# EAGLE board PCB Design (EAGLE 9.1.3)
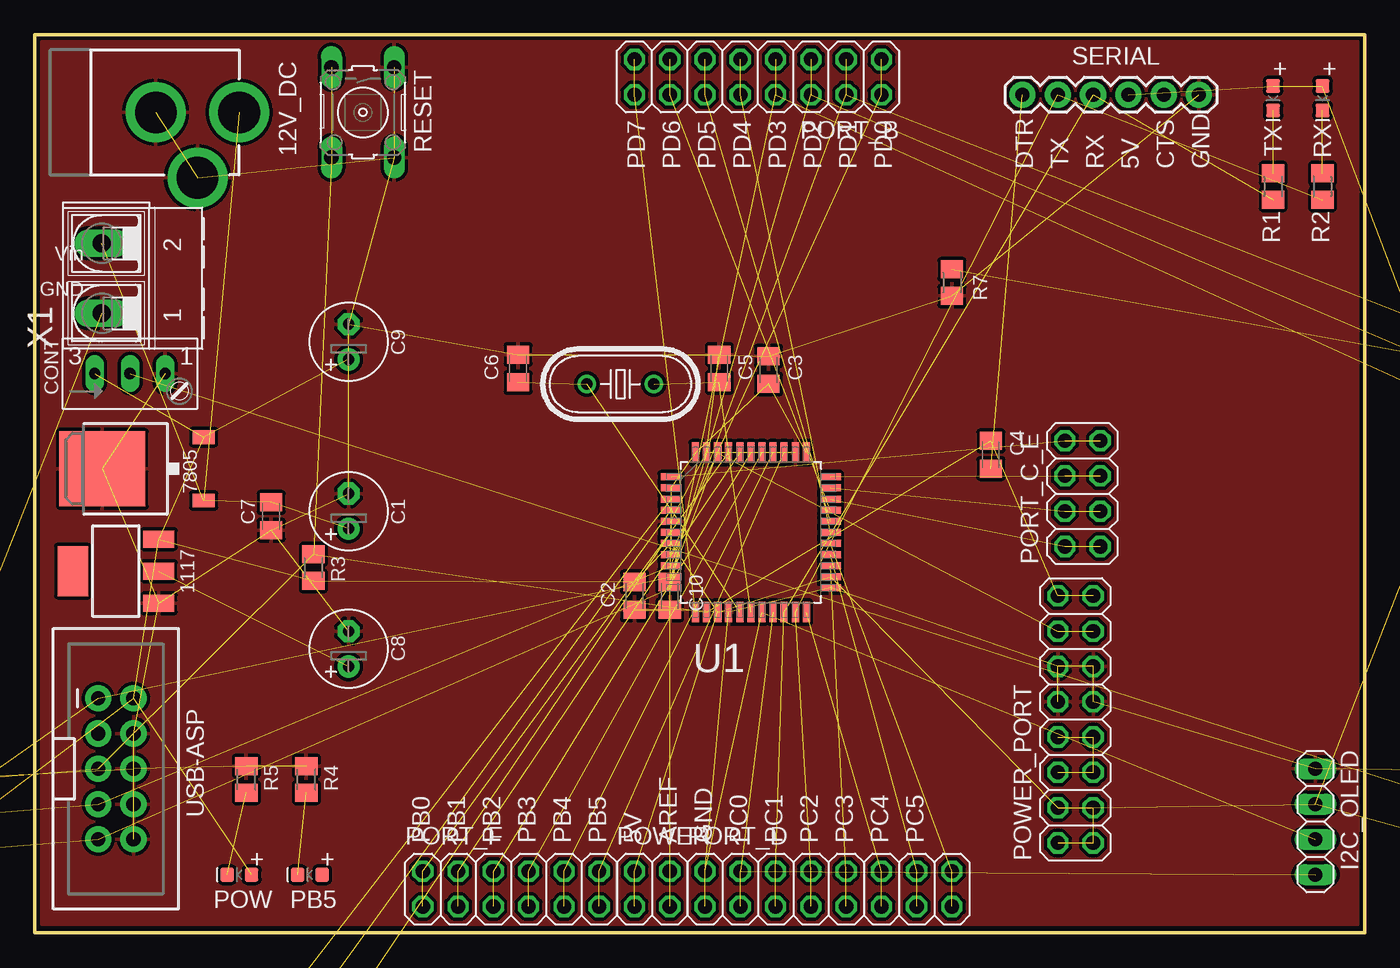
[diagram p0: board, top side]
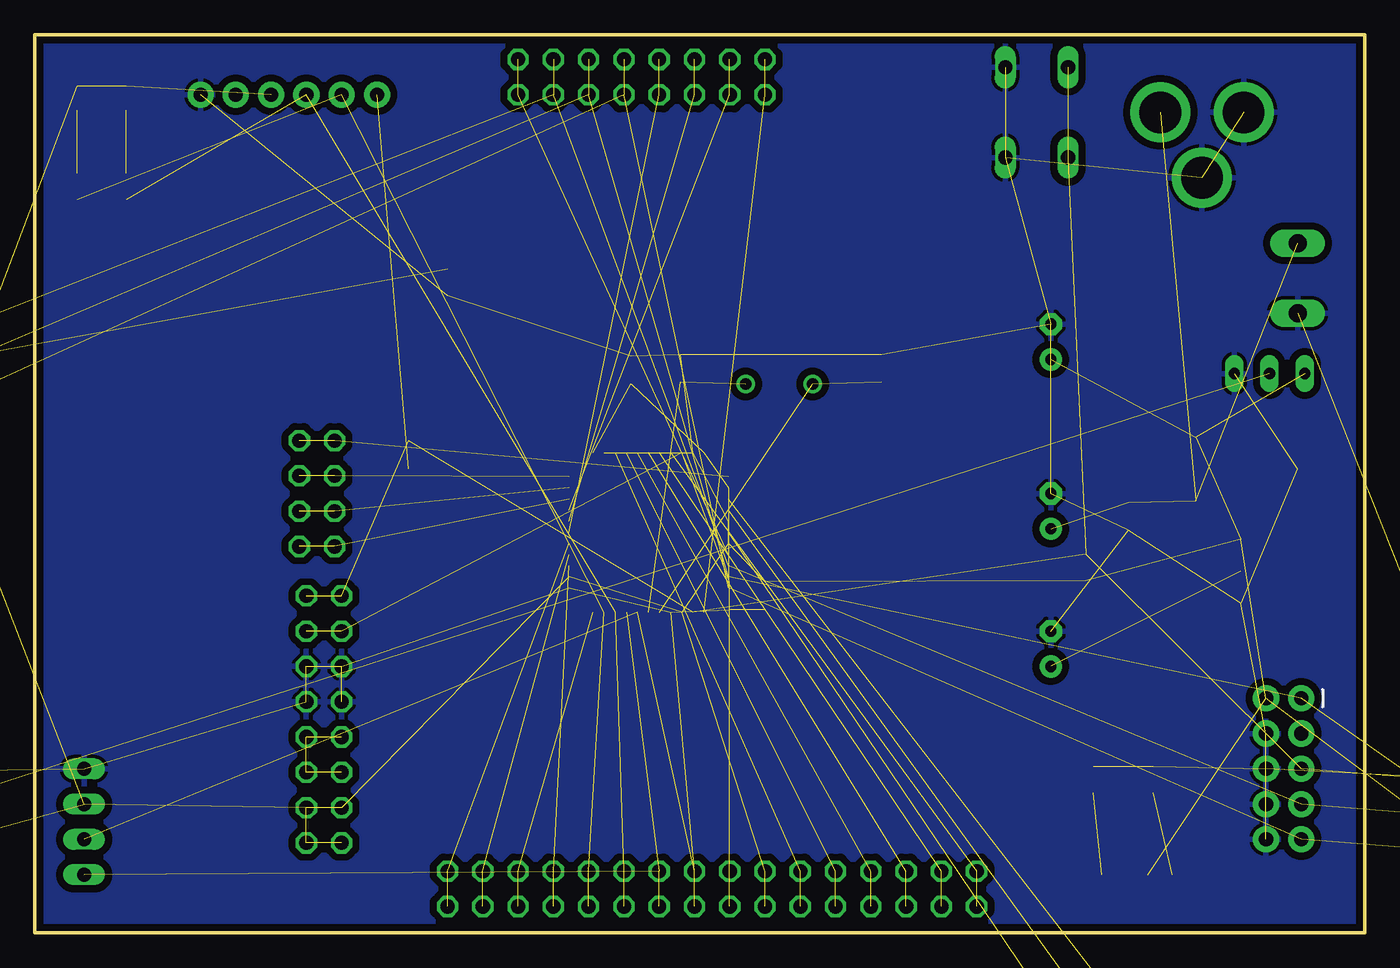
[diagram p1: board, bottom side, seen from below]

Size 95.76 x 64.64 mm. Coordinates in mm from the lower left corner, seen from the top.
Outline: 0,64.64 95.76,64.64 95.76,0 0,0 0,64.64
Copper layers (1*16): Top 0.035mm / dielectric 1.5mm / Bottom 0.035mm
Design rules "SparkFun-2-layer-STANDARD *": minimum track width 10mil, minimum drill 19mil, track to track 10mil, track to pad 8mil, pad to pad 8mil, via to via 10mil, smd to smd 8mil, copper to edge 8mil, drill to drill 8mil, minimum pad ring 10mil, minimum via ring 10mil, stop-mask expansion 4mil, vias tented up to drill 25mil, thermal gap 10mil

## Footprints (pad centres in the part's own frame; a part is rotated, then mirrored left to right if it is on the bottom)
POWER_JACK_PTH = drill 2.997 pad 4.318: GND 0,7.7; GNDBREAK 4.7,10.7; PWR 0,13.7
SOT223 = smd 1.219 x 2.235: 1 -2.311,-3.099; 2 0,-3.099; 3 2.311,-3.099 | smd 3.6 x 2.2: 4 0,3.099
TO-252 = smd 1 x 1.6: 1 -2.28,-4.8; 2 2.28,-4.8 | smd 5.4 x 6.2: 3 0,2.5
B3F-10XX = drill 1.016 long: 1 -3.251,2.261; 2 3.251,2.261; 3 -3.251,-2.261; 4 3.251,-2.261
E2,5-6 = drill 0.813 pad 1.6: + -1.27,0 | drill 0.813 pad 1.6 octagon: - 1.27,0
C0805K = smd 1.3 x 1.6: 1 -1,0; 2 1,0
S64W = drill 0.813 long: A 2.54,1.27; E -2.54,1.27; S 0,1.27
1X04 = drill 1.016 long: 1 -3.81,0; 2 -1.27,0; 3 1.27,0; 4 3.81,0
2X3 = drill 1.016 pad 1.88: 1 0,0; 2 0,2.54; 3 2.54,0; 4 2.54,2.54; 5 5.08,0; 6 5.08,2.54
USB-MICROB-PTH = smd 0.4 x 1.75: D+ 0.031,1.331; D- -0.619,1.331; GND 1.331,1.331; ID 0.681,1.331; VBUS -1.269,1.331 | smd 1.4 x 2.1 bottom: P$1 2.701,-1.142; P$3 -2.659,-1.144 | smd 1 x 1.3: P$2 2.487,1.594; P$6 -2.368,1.604 | smd 1 x 1.3 bottom: P$4 -2.368,1.604; P$10 2.481,1.598 | smd 1.1 x 1.5: P$8 2.701,-1.142; P$12 -2.659,-1.144 | smd 2 x 1.46: SHEILD2 2.831,1.606; SHIELD -2.794,1.606 | smd 1.425 x 2.5: SHIELD3 -0.979,-1.349; SHIELD4 0.996,-1.352 | hole 0.7: -2.693,-1.134; -2.693,-1.3; -2.694,-1.499; -2.694,-1.664; 2.768,-1.134; 2.767,-1.303; 2.766,-1.496; 2.766,-1.664 | hole 0.66: -2.359,1.821; -2.349,1.691; -2.359,1.541; -2.354,1.432; 2.481,1.821; 2.491,1.691; 2.481,1.541; 2.486,1.432
SMT-JUMPER_3_1-NC_PASTE_SILK = smd 0.635 x 1.27: 1 -0.813,0; 2 0,0; 3 0.813,0
LCD-16X2_NOSILK = drill 1.016 pad 1.88 square: 1 -32,15.5 | drill 1.016 pad 1.88: 2 -29.46,15.5; 3 -26.92,15.5; 4 -24.38,15.5; 5 -21.84,15.5; 6 -19.3,15.5; 7 -16.76,15.5; 8 -14.22,15.5; 9 -11.68,15.5; 10 -9.14,15.5; 11 -6.6,15.5; 12 -4.06,15.5; 13 -1.52,15.5; 14 1.02,15.5; 15 3.56,15.5; 16 6.1,15.5 | hole 2.8: -37.5,15.5; -37.5,-15.5; 37.5,15.5; 37.5,-15.5
LED-0603 = smd 1 x 1: A -0.877,0; C 0.877,0
2X08 = drill 1.016 octagon: 1 -8.89,-1.27; 2 -8.89,1.27; 3 -6.35,-1.27; 4 -6.35,1.27; 5 -3.81,-1.27; 6 -3.81,1.27; 7 -1.27,-1.27; 8 -1.27,1.27; 9 1.27,-1.27; 10 1.27,1.27; 11 3.81,-1.27; 12 3.81,1.27; 13 6.35,-1.27; 14 6.35,1.27; 15 8.89,-1.27; 16 8.89,1.27
2X04 = drill 1.016 octagon: 1 -3.81,-1.27; 2 -3.81,1.27; 3 -1.27,-1.27; 4 -1.27,1.27; 5 1.27,-1.27; 6 1.27,1.27; 7 3.81,-1.27; 8 3.81,1.27
2X06 = drill 1.016 octagon: 1 -6.35,-1.27; 2 -6.35,1.27; 3 -3.81,-1.27; 4 -3.81,1.27; 5 -1.27,-1.27; 6 -1.27,1.27; 7 1.27,-1.27; 8 1.27,1.27; 9 3.81,-1.27; 10 3.81,1.27; 11 6.35,-1.27; 12 6.35,1.27
2X03 = drill 1.016 octagon: 1 -2.54,-1.27; 2 -2.54,1.27; 3 0,-1.27; 4 0,1.27; 5 2.54,-1.27; 6 2.54,1.27
HC49U70 = drill 0.813: 1 -2.413,0; 2 2.413,0
M0805 = smd 1.3 x 1.6: 1 -0.95,0; 2 0.95,0
FTDI_BASIC = drill 1.016 pad 1.88: CTS 10.16,0; DTR 0,0; GND 12.7,0; RXI 2.54,0; TXO 5.08,0; VCC 7.62,0
1X06 = drill 1.016 long: 1 -6.35,0; 2 -3.81,0; 3 -1.27,0; 4 1.27,0; 5 3.81,0; 6 6.35,0
QFP80P1200X1200X120-44N = smd 1.473 x 0.508: 1 -5.74,3.988; 2 -5.74,3.2; 3 -5.74,2.388; 4 -5.74,1.6; 5 -5.74,0.787; 6 -5.74,0; 7 -5.74,-0.787; 8 -5.74,-1.6; 9 -5.74,-2.388; 10 -5.74,-3.2; 11 -5.74,-3.988; 23 5.74,-3.988; 24 5.74,-3.2; 25 5.74,-2.388; 26 5.74,-1.6; 27 5.74,-0.787; 28 5.74,0; 29 5.74,0.787; 30 5.74,1.6; 31 5.74,2.388; 32 5.74,3.2; 33 5.74,3.988 | smd 0.508 x 1.473: 12 -3.988,-5.74; 13 -3.2,-5.74; 14 -2.388,-5.74; 15 -1.6,-5.74; 16 -0.787,-5.74; 17 0,-5.74; 18 0.787,-5.74; 19 1.6,-5.74; 20 2.388,-5.74; 21 3.2,-5.74; 22 3.988,-5.74; 34 3.988,5.74; 35 3.2,5.74; 36 2.388,5.74; 37 1.6,5.74; 38 0.787,5.74; 39 0,5.74; 40 -0.787,5.74; 41 -1.6,5.74; 42 -2.388,5.74; 43 -3.2,5.74; 44 -3.988,5.74
2X5-SHROUDED = drill 1.016 pad 1.88: 1 -1.27,5.08; 2 1.27,5.08; 3 -1.27,2.54; 4 1.27,2.54; 5 -1.27,0; 6 1.27,0; 7 -1.27,-2.54; 8 1.27,-2.54; 9 -1.27,-5.08; 10 1.27,-5.08
AK500/2-H = drill 1.321 long: 1 -2.515,0; 2 2.515,0

## Placement (x,y rotation side)
12V_DC  POWER_JACK  [POWER_JACK_PTH]  1.02,59.05 270 top
1117  V_REG_LD1117VXXLD1117-SMD  [SOT223]  5.84,26.04 90 top
7805  5V  [TO-252]  7.37,33.4 90 top
BUTTON_1  [B3F-10XX]  -30.99,-63.88 0 top  (outside the outline)
BUTTON_2  [B3F-10XX]  -50.8,-81.15 0 top  (outside the outline)
C1  10uf  [E2,5-6]  22.61,30.35 90 top
C2  .1uF  [C0805K]  43.18,24.26 270 top
C3  .1uF  [C0805K]  52.83,40.51 90 top
C4  0.33µF  [C0805K]  68.83,34.42 270 top
C5  22pF  [C0805K]  49.28,40.62 270 top
C6  22pF  [C0805K]  34.8,40.62 270 top
C7  .1uf  [C0805K]  17.02,29.99 270 top
C8  10uf  [E2,5-6]  22.61,20.45 90 top
C9  10uf  [E2,5-6]  22.61,42.55 90 top
C10  .1uF  [C0805K]  45.72,24.26 270 top
C11  1uF  [E2,5-6]  -12.19,-58.8 0 top  (outside the outline)
CONT  50k  [S64W]  6.86,38.99 0 top
I2C_OLED  [1X04]  92.2,8 270 top
J1  AVR_SPI_PROG_3X2PTH  [2X3]  -4.83,5.97 90 top  (outside the outline)
J2  AMP FCI 10103594-0001LF  [USB-MICROB-PTH]  -10.92,-38.23 0 top  (outside the outline)
JP2  JUMPER-SMT_3_1-NC_PASTE_SILK  [SMT-JUMPER_3_1-NC_PASTE_SILK]  -38.1,-73.53 0 top  (outside the outline)
JP3  JUMPER-SMT_3_1-NC_PASTE_SILK  [SMT-JUMPER_3_1-NC_PASTE_SILK]  -48.01,-73.53 0 top  (outside the outline)
JP4  JUMPER-SMT_3_1-NC_PASTE_SILK  [SMT-JUMPER_3_1-NC_PASTE_SILK]  -48.01,-86.74 0 top  (outside the outline)
JP5  JUMPER-SMT_3_1-NC_PASTE_SILK  [SMT-JUMPER_3_1-NC_PASTE_SILK]  -48.01,-90.81 0 top  (outside the outline)
LCD1  LCD-16X2NOSILK  [LCD-16X2_NOSILK]  127,33.4 90 top  (outside the outline)
PB1  Yellow  [LED-0603]  -13.46,-16.13 0 top  (outside the outline)
PB2  Yellow  [LED-0603]  -13.46,-25.53 0 top  (outside the outline)
PB5  Yellow  [LED-0603]  19.81,4.19 180 top
PORT_B  [2X08]  52.07,61.59 180 top
PORT_C_E  [2X04]  75.44,31.62 90 top
PORT_D  [2X08]  57.15,3.18 0 top
PORT_F  [2X06]  34.29,3.18 0 top
POW  RED  [LED-0603]  14.73,4.19 180 top
POWER  [2X03]  45.72,3.18 0 top
POWER_PORT  [2X08]  74.93,15.37 90 top
Q1  16MHz  [HC49U70]  42.16,39.5 180 top
R1  1K  [M0805]  89.15,53.72 90 top
R2  1K  [M0805]  92.71,53.72 90 top
R3  10k  [M0805]  20.07,26.29 90 top
R4  1K  [M0805]  19.56,11.05 270 top
R5  1K  [M0805]  15.24,11.05 270 top
R6  1K  [M0805]  -13.21,-11.3 0 top  (outside the outline)
R7  220  [M0805]  66.04,46.8 90 top
R8  1K  [M0805]  -13.21,-20.7 0 top  (outside the outline)
R9  22  [M0805]  -13.21,-46.36 0 top  (outside the outline)
R10  22  [M0805]  -13.21,-52.45 0 top  (outside the outline)
R11  10K  [M0805]  -34.04,-72.52 0 top  (outside the outline)
R12  10K  [M0805]  -43.43,-78.61 0 top  (outside the outline)
RESET  [B3F-10XX]  23.62,59.05 270 top
RX  Yellow  [LED-0603]  92.71,60.07 270 top
SERIAL  6_PIN_SERIAL_CABLEPTH  [FTDI_BASIC]  71.12,60.33 0 top
SPI_SD_CARD  [1X06]  102.36,39.24 270 top  (outside the outline)
TX  Yellow  [LED-0603]  89.15,60.07 270 top
U1  ATMEGA32U4-AU  [QFP80P1200X1200X120-44N]  51.56,28.83 0 top
USB-ASP  AVR_SPI_PROG_5X2PTH2  [2X5-SHROUDED]  5.84,11.81 0 top
X1  [AK500/2-H]  4.83,47.12 90 top

## Library data of the parts
12V_DC = SparkFun-Connectors; MF: MULTICOMP; MPN: SPC21365; OC_FARNELL: 1310918; PROD_ID: CONN-08197
1117 = SparkFun-IC-Power; OC_FARNELL: unknown; PROD_ID: VREG-13917
7805 = SparkFun-IC-Power; OC_FARNELL: unknown; PROD_ID: VREG-12370
BUTTON_1 BUTTON_2 RESET = switch-omron; MF: OMRON ELECTRONIC COMPONENTS; MPN: B3F-1000; OC_FARNELL: 176432; OC_NEWARK: 36M3542
C1 C8 C9 C11 R1-R12 = resistor; OC_FARNELL: unknown
C2-C7 C10 = rcl; OC_FARNELL: unknown
CONT = pot; OC_FARNELL: unknown
I2C_OLED PORT_C_E POWER_PORT SPI_SD_CARD = pinhead
J1 = SparkFun-Connectors
J2 = SparkFun-Connectors; PROD_ID: CONN-13711
JP2-JP5 = SparkFun-Jumpers
LCD1 = SparkFun-Displays; OC_FARNELL: unknown; SF_ID: LCD-00255
PB1 PB2 PB5 POW RX TX = SparkFun-LED; OC_FARNELL: unknown; PROD_ID: DIO-08575
PORT_B PORT_D PORT_F POWER = pinhead; OC_FARNELL: unknown
Q1 = crystal; OC_FARNELL: unknown; OC_NEWARK: unknown
SERIAL = SparkFun-Connectors; OC_FARNELL: unknown
U1 = ATMEGA32U4-AU; AVAILABILITY: Unavailable; DESCRIPTION: MCU 8-bit ATmega AVR RISC 32KB Flash 3.3V/5V 44-Pin TQFP; MF: Microchip; MP: ATMEGA32U4-AU; PACKAGE: TQFP-44 Microchip; PRICE: None
USB-ASP = SparkFun-Connectors; OC_FARNELL: unknown; PROD_ID: CONN-08671; SF_ID: PRT-08506
X1 = con-ptr500; OC_FARNELL: unknown; OC_NEWARK: unknown

## Nets
3.3V: 1117.2 C8.+
3V3: POWER_PORT.5 POWER_PORT.6 POWER_PORT.7 POWER_PORT.8
+5V: 1117.3 7805.2 C2.1 C3.1 C9.+ CONT.E I2C_OLED.2 J1.2 J2.VBUS JP2.1 JP3.3 JP4.1 JP5.3 LCD1.2 LCD1.15 POW.A POWER.1 POWER.2 POWER_PORT.1 POWER_PORT.2 POWER_PORT.3 POWER_PORT.4 R3.1 RX.A SERIAL.VCC SPI_SD_CARD.5 TX.A U1.2 U1.7 U1.14 U1.24 U1.34 U1.44 USB-ASP.2
+12V: 12V_DC.PWR 7805.1 C1.+ C7.1 X1.2
AREF: C10.1 POWER.3 POWER.4 POWER_PORT.13 POWER_PORT.14 U1.42
CS: SPI_SD_CARD.1
CTS: SERIAL.CTS
D4: LCD1.11
D5: LCD1.12
D6: LCD1.13
D7: LCD1.14
D+: J2.D+ R10.2
D-: J2.D- R9.2
DTR: C4.2 SERIAL.DTR
E: LCD1.6
GND: 12V_DC.GND 12V_DC.GNDBREAK 1117.1 7805.3 C1.- C2.2 C3.2 C5.1 C6.1 C7.2 C8.- C9.- C10.2 C11.- CONT.A I2C_OLED.1 J1.6 J2.GND JP2.3 JP3.1 JP4.3 JP5.1 LCD1.1 LCD1.5 POWER.5 POWER.6 POWER_PORT.9 POWER_PORT.10 POWER_PORT.11 POWER_PORT.12 R4.1 R5.1 R6.1 R7.1 R8.1 RESET.1 RESET.2 SERIAL.GND SPI_SD_CARD.6 U1.5 U1.15 U1.23 U1.35 U1.43 USB-ASP.4 USB-ASP.6 USB-ASP.8 USB-ASP.10 X1.1
ID: J2.ID
N$1: PB5.C R4.2
N$2: POW.C R5.2
N$3: PB1.C R6.2
N$6: CONT.S LCD1.3
N$7: PB2.C R8.2
N$8: R2.2 RX.C
N$9: R1.2 TX.C
N$10: PB1.A
N$11: PB2.A
N$12: PB5.A
N$13: R9.1 U1.3
N$14: LCD1.16 R7.2
N$15: R10.1 U1.4
N$16: C11.+ U1.6
N$17: JP2.2 R11.1
N$18: BUTTON_1.3 BUTTON_1.4 JP3.2
N$19: BUTTON_2.3 BUTTON_2.4 JP5.2
N$20: JP4.2 R12.1
PB0: PORT_B.1 PORT_B.2 U1.8
PB1: J1.3 PORT_B.3 PORT_B.4 SPI_SD_CARD.2 U1.9 USB-ASP.7
PB2: J1.4 PORT_B.5 PORT_B.6 SPI_SD_CARD.3 U1.10 USB-ASP.1
PB3: J1.1 PORT_B.7 PORT_B.8 SPI_SD_CARD.4 U1.11 USB-ASP.9
PB4: PORT_B.9 PORT_B.10 U1.28
PB5: PORT_B.11 PORT_B.12 U1.29
PB6: PORT_B.13 PORT_B.14 U1.30
PB7: PORT_B.15 PORT_B.16 U1.12
PC6: PORT_C_E.1 PORT_C_E.2 U1.31
PC7: PORT_C_E.3 PORT_C_E.4 U1.32
PD0: I2C_OLED.3 PORT_D.1 PORT_D.2 U1.18
PD1: I2C_OLED.4 PORT_D.3 PORT_D.4 U1.19
PD2: PORT_D.5 PORT_D.6 R1.1 SERIAL.TXO U1.20
PD3: PORT_D.7 PORT_D.8 R2.1 SERIAL.RXI U1.21
PD4: PORT_D.9 PORT_D.10 U1.25
PD5: PORT_D.11 PORT_D.12 U1.22
PD6: PORT_D.13 PORT_D.14 U1.26
PD7: PORT_D.15 PORT_D.16 U1.27
PE2: PORT_C_E.5 PORT_C_E.6 U1.33
PE6: PORT_C_E.7 PORT_C_E.8 U1.1
PF0: PORT_F.1 PORT_F.2 U1.41
PF1: PORT_F.3 PORT_F.4 U1.40
PF4: PORT_F.5 PORT_F.6 U1.39
PF5: PORT_F.7 PORT_F.8 U1.38
PF6: PORT_F.9 PORT_F.10 U1.37
PF7: PORT_F.11 PORT_F.12 U1.36
PIN: BUTTON_1.1 BUTTON_1.2 BUTTON_2.1 BUTTON_2.2 R11.2 R12.2
RESET: C4.1 J1.5 POWER_PORT.15 POWER_PORT.16 R3.2 RESET.3 RESET.4 U1.13 USB-ASP.5
RS: LCD1.4
XTAL1: C5.2 Q1.1 U1.17
XTAL2: C6.2 Q1.2 U1.16

## Tracks (layer width: path | path; a pad name or v marks a point on that pad's centre or on a via)
3.3V  (1 unrouted)
3V3  (3 unrouted)
+5V  (33 unrouted)
+12V  (4 unrouted)
AREF  (5 unrouted)
D+  (1 unrouted)
D-  (1 unrouted)
DTR  (1 unrouted)
GND  (48 unrouted)
  pour Bottom (isolate 0.508): 0.51,64.13 95.25,64.13 95.25,0.63 0.51,0.63
  pour Top: 95.25,0.63 95.25,64.13 0.51,64.13 0.51,0.63
N$1  (1 unrouted)
N$2  (1 unrouted)
N$3  (1 unrouted)
N$6  (1 unrouted)
N$7  (1 unrouted)
N$8  (1 unrouted)
N$9  (1 unrouted)
N$13  (1 unrouted)
N$14  (1 unrouted)
N$15  (1 unrouted)
N$16  (1 unrouted)
N$17  (1 unrouted)
N$18  (2 unrouted)
N$19  (2 unrouted)
N$20  (1 unrouted)
PB0  (2 unrouted)
PB1  (5 unrouted)
PB2  (5 unrouted)
PB3  (5 unrouted)
PB4  (2 unrouted)
PB5  (2 unrouted)
PB6  (2 unrouted)
PB7  (2 unrouted)
PC6  (2 unrouted)
PC7  (2 unrouted)
PD0  (3 unrouted)
PD1  (3 unrouted)
PD2  (4 unrouted)
PD3  (4 unrouted)
PD4  (2 unrouted)
PD5  (2 unrouted)
PD6  (2 unrouted)
PD7  (2 unrouted)
PE2  (2 unrouted)
PE6  (2 unrouted)
PF0  (2 unrouted)
PF1  (2 unrouted)
PF4  (2 unrouted)
PF5  (2 unrouted)
PF6  (2 unrouted)
PF7  (2 unrouted)
PIN  (5 unrouted)
RESET  (8 unrouted)
XTAL1  (2 unrouted)
XTAL2  (2 unrouted)

## Text on the board
tPlace: + | + | PD7 | PD6 | PD5 | PD4 | PD3 | PD2 | PD1 | PD0 | DTR | TX | RX | 5V | CTS | GND | Vin | GND | Chirag Shah / 2/Apr/18 | ATmega Board | V2 | PB0 | PB1 | PB2 | PB3 | PB4 | PB5 | 5V | AREF | GND | PC0 | PC1 | PC2 | PC3 | PC4 | PC5 | + | +